# Altium PCB PCB2.PcbDoc
Units mm, origin at the board's own origin, x right, y up, seen from the top; angles counter-clockwise.
Board outline 216.35 x 75.78 mm, 2 copper layers (Top Layer, Bottom Layer), stack 1.571 mm thick; 15 components, 69 nets, 287 pads, 24 vias.
Unrouted connection lines stored in the file: 13.
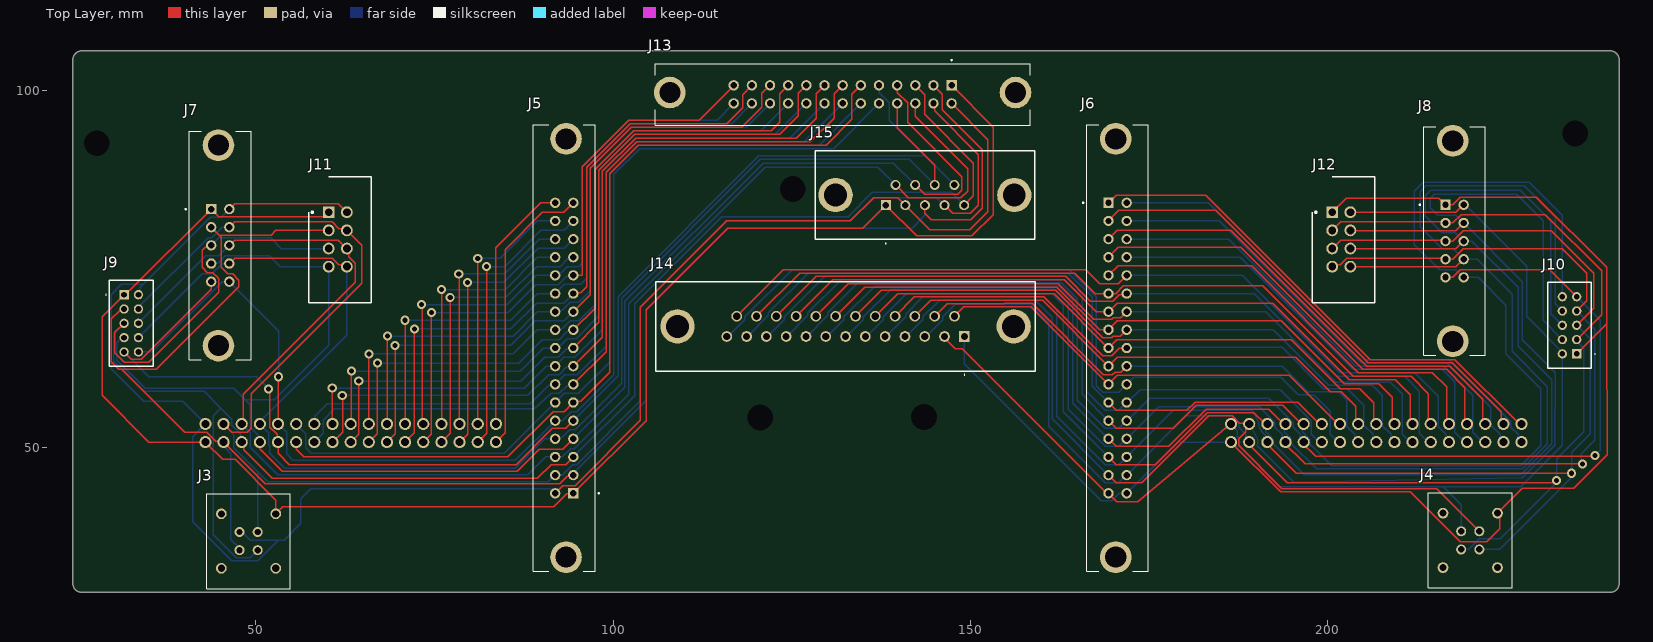
[diagram p0: Top Layer view]
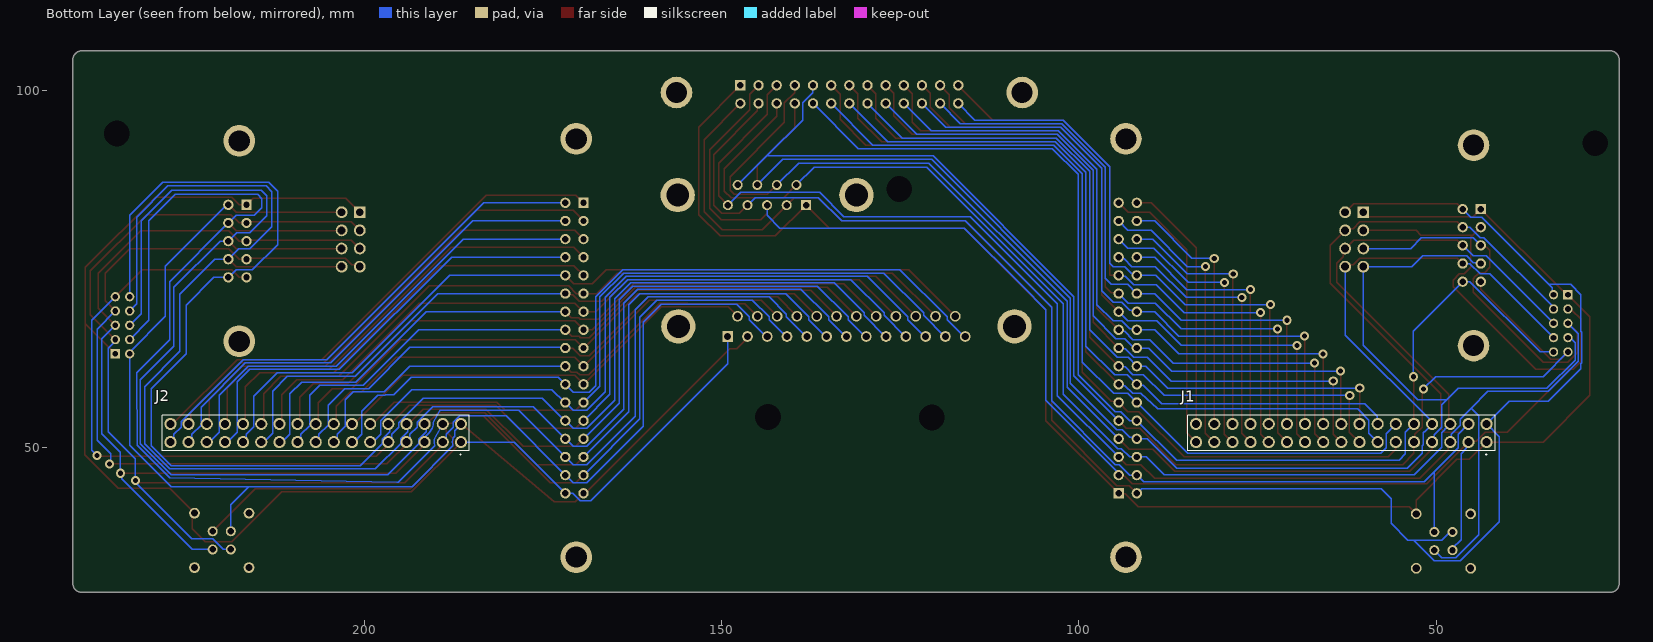
[diagram p1: Bottom Layer view, seen from below]
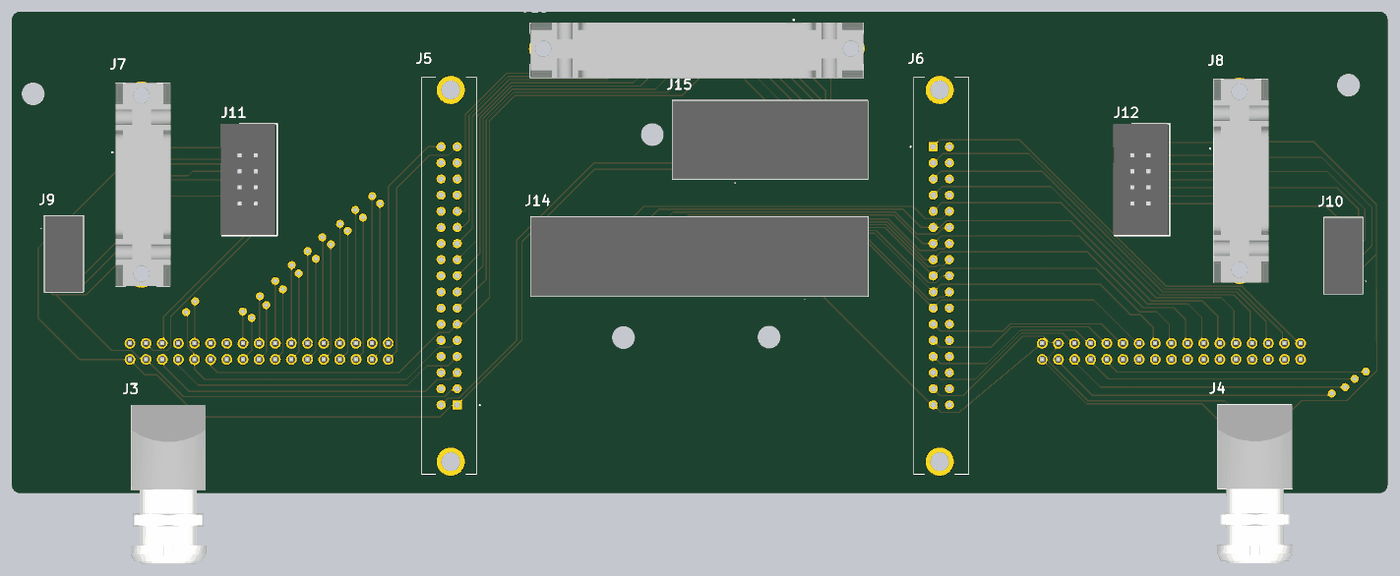
[diagram p2: 3D render of the assembled board from above, using the file's embedded part models]

## Layer stack, top to bottom
Top Solder: solder mask 0.0102, Solder Resist, Dk 3.5
Top Layer: signal copper 0.0356
Dielectric 1: dielectric 1.5, FR-4, Dk 4.8
Bottom Layer: signal copper 0.0356
Bottom Solder: solder mask 0.0102, Solder Resist, Dk 3.5

## Board outline
25.67,29.725 cw(c25.67,30.995) 24.4,30.995 24.4,104.23 cw(c25.67,104.23) 25.67,105.5 27.42,105.5 229.58,105.5 239.48,105.5 cw(c239.48,104.23) 240.75,104.23 240.75,95 240.75,43.368 240.75,30.995 cw(c239.48,30.995) 239.48,29.725 229.58,29.725 215.35,29.725 42.325,29.725 39.622,29.725 27.42,29.725

## Design rules (kind name [scope] priority, off if disabled: settings)
Clearance [All] p1: gap=0.254 ignorepadtopadclearanceinfootprint=FALSE
PolygonConnect [All] p1: connectstyle=Relief reliefconductorwidth=0.254 reliefentries=4 polygonreliefangle="90 Angle" airgapwidth=0.254
RoutingVias [All] p1: holewidth=0.711 width=1.27 viastyle="Through Hole" minholewidth=0.711 minwidth=1.27 maxholewidth=0.711 maxwidth=1.27
SolderMaskExpansion [All] p1: expansion=0.102 istentingtop=FALSE
SupplyNets "Schematic Supply Nets" [InNet('GND')] p1: voltage=0.000
Width [All] p1: maxlimit=10 minlimit=0.1 preferedwidth=0.2
30 further rules are at their usual default settings.

## Components (designator, comment, footprint, x,y, rotation, side; value= is the part's Value field where it differs from the comment)
J1 "ESQ-117-33-T-D" ESQ-117-Y-X-D 42.95,50.757 r180 bottom locked
J2 "ESQ-117-33-T-D" ESQ-117-Y-X-D 186.45,50.757 r180 bottom
J3 "EXP.0S.304.HLN" EXP0S304HLN 50.26,38.18 r270 top
J4 "EXP.0S.304.HLN" EXP0S304HLN 221.18,38.28 r270 top
J5 "D3431-6002-AR" D3431-6002-AR 94.425,43.6 r90 top
J6 "D3431-6002-AR" D3431-6002-AR 169.3,84.24 r270 top
J7 "D3793-6002-AR" D3793-6002-AR 43.76,83.36 r270 top
J8 "D3793-6002-AR" D3793-6002-AR 216.45,83.96 r270 top
J9 "98414-G08-10LF" 98414G0810LF 31.575,71.375 r270 top
J10 "98414-G08-10LF" 98414G0810LF 234.8,63.1 r90 top
J11 "N2508-6002-RB" SHDR8W64P254_2X4_1748X859X1004P 60.2,82.92 r270 top
J12 "N2508-6002-RB" SHDR8W64P254_2X4_1748X859X1004P 200.6,82.92 r270 top
J13 "D3429-6302-AR" D34296302AR 147.35,100.682 r180 top locked
J14 "L17HTNBHPOL2RM84C" L17HTNBHPOL2RM84C 149.135,65.527 r180 top locked
J15 "L177DFE09ST" L177DFE09ST 138.14,83.9 r180 top

## Footprints (in the part's own frame and the unit in brackets; to place one, negate y for a bottom-side part, rotate by r counter-clockwise, add the part's x,y. Pads: shape width x height; smd on the part's side, far side on the other; paste and mask are expansions set on the pad)
98414G0810LF [mm]
  rect 1.3x1.3 hole 0.8: A1(0,0)
  round 1.3 hole 0.8: A2(2,0) A3(4,0) A4(6,0) A5(8,0) B1(0,2) B2(2,2) B3(4,2) B4(6,2) B5(8,2)
  silkscreen extent -2,-2.6 10,4.05, body extent -2,-2.05 10,4.05, height 6.3
D3431-6002-AR [mm]
  rect 1.446x1.446 hole 0.89: 1(0,0)
  round 1.446 hole 0.89: 2(0,2.54) 3(2.54,0) 4(2.54,2.54) 5(5.08,0) 6(5.08,2.54) 7(7.62,0) 8(7.62,2.54) 9(10.16,0) 10(10.16,2.54) 11(12.7,0) 12(12.7,2.54) 13(15.24,0) 14(15.24,2.54) 15(17.78,0) 16(17.78,2.54) 17(20.32,0) 18(20.32,2.54) 19(22.86,0) 20(22.86,2.54) 21(25.4,0) 22(25.4,2.54) 23(27.94,0) 24(27.94,2.54) 25(30.48,0) 26(30.48,2.54) 27(33.02,0) 28(33.02,2.54) 29(35.56,0) 30(35.56,2.54) 31(38.1,0) 32(38.1,2.54) 33(40.64,0) 34(40.64,2.54)
  round 4.425 hole 2.95: MH1(-8.941,1.016) MH2(49.581,1.016)
  silkscreen extent -10.92,-3.61 51.56,5.59
D3793-6002-AR [mm] "Connector"
  rect 1.446x1.446 hole 0.89: 1(0,0)
  round 1.446 hole 0.89: 2(0,2.54) 3(2.54,0) 4(2.54,2.54) 5(5.08,0) 6(5.08,2.54) 7(7.62,0) 8(7.62,2.54) 9(10.16,0) 10(10.16,2.54)
  round 4.425 hole 2.95: MH1(-8.941,1.016) MH2(19.101,1.016)
  silkscreen extent -10.92,-3.63 21.08,5.59, body extent -10.93,-3.06 21.08,5.58, height 17.27
D34296302AR [mm]
  rect 1.446x1.446 hole 0.89: 1(0,0)
  round 1.446 hole 0.89: 2(0,2.54) 3(2.54,0) 4(2.54,2.54) 5(5.08,0) 6(5.08,2.54) 7(7.62,0) 8(7.62,2.54) 9(10.16,0) 10(10.16,2.54) 11(12.7,0) 12(12.7,2.54) 13(15.24,0) 14(15.24,2.54) 15(17.78,0) 16(17.78,2.54) 17(20.32,0) 18(20.32,2.54) 19(22.86,0) 20(22.86,2.54) 21(25.4,0) 22(25.4,2.54) 23(27.94,0) 24(27.94,2.54) 25(30.48,0) 26(30.48,2.54)
  round 4.425 hole 2.95: MH1(-8.941,1.016) MH2(39.421,1.016)
  silkscreen extent -10.98,-3.58 41.46,5.57, body extent -10.96,-3.07 41.36,5.57, height 17.27
ESQ-117-Y-X-D [mm]
  round 1.7 hole 1.15: 1(0,0) 2(0,2.54) 3(-2.54,0) 4(-2.54,2.54) 5(-5.08,0) 6(-5.08,2.54) 7(-7.62,0) 8(-7.62,2.54) 9(-10.16,0) 10(-10.16,2.54) 11(-12.7,0) 12(-12.7,2.54) 13(-15.24,0) 14(-15.24,2.54) 15(-17.78,0) 16(-17.78,2.54) 17(-20.32,0) 18(-20.32,2.54) 19(-22.86,0) 20(-22.86,2.54) 21(-25.4,0) 22(-25.4,2.54) 23(-27.94,0) 24(-27.94,2.54) 25(-30.48,0) 26(-30.48,2.54) 27(-33.02,0) 28(-33.02,2.54) 29(-35.56,0) 30(-35.56,2.54) 31(-38.1,0) 32(-38.1,2.54) 33(-40.64,0) 34(-40.64,2.54)
  silkscreen extent -41.82,-1.8 1.18,3.74, body extent -42.14,-1.25 1.54,3.83, height 1.81
EXP0S304HLN [mm]
  round 1.4 hole 0.9: 1(0,0) 2(0,-2.54) 3(2.54,-2.54) 4(2.54,0)
  round 1.5 hole 1: G1(-2.54,2.54) G2(-2.54,-5.08) G3(5.08,-5.08) G4(5.08,2.54)
  silkscreen extent -5.38,-7.12 7.92,4.58, body extent -5.38,-7.19 19.62,4.65, height 13.78
L17HTNBHPOL2RM84C [mm]
  rect 1.5x1.5 hole 1: 1(0,0)
  round 1.5 hole 1: 2(2.77,0) 3(5.54,0) 4(8.31,0) 5(11.08,0) 6(13.85,0) 7(16.62,0) 8(19.39,0) 9(22.16,0) 10(24.93,0) 11(27.7,0) 12(30.47,0) 13(33.24,0) 14(1.385,-2.84) 15(4.155,-2.84) 16(6.925,-2.84) 17(9.695,-2.84) 18(12.465,-2.84) 19(15.235,-2.84) 20(18.005,-2.84) 21(20.775,-2.84) 22(23.545,-2.84) 23(26.315,-2.84) 24(29.085,-2.84) 25(31.855,-2.84)
  round 4.8 hole 3.2: MH1(-6.9,-1.42) MH2(40.14,-1.42)
  silkscreen extent -9.9,-7.7 43.14,5.4, body extent -9.9,-7.7 43.14,4.85, height 12.6
L177DFE09ST [mm]
  rect 1.4x1.4 hole 0.9: 1(0,0)
  round 1.4 hole 0.9: 2(-2.74,0) 3(-5.48,0) 4(-8.22,0) 5(-10.96,0) 6(-1.37,-2.84) 7(-4.11,-2.84) 8(-6.85,-2.84) 9(-9.59,-2.84)
  round 4.8 hole 3.2: MH1(7.02,-1.42) MH2(-17.98,-1.42)
  silkscreen extent -20.83,-7.62 9.87,5.4, body extent -20.83,-7.62 9.87,4.78, height 12.3
SHDR8W64P254_2X4_1748X859X1004P [mm]
  rect 1.65x1.65 hole 1.1: 1(0,0)
  round 1.65 hole 1.1: 2(0,2.54) 3(2.54,0) 4(2.54,2.54) 5(5.08,0) 6(5.08,2.54) 7(7.62,0) 8(7.62,2.54)
  silkscreen extent -4.93,-2.8 12.68,5.92, body extent -4.93,-3.03 12.55,5.57, height 10.04

## Part data
J1 J2: "Connector", Manufacturer_Name=SAMTEC, Manufacturer_Part_Number=ESQ-117-44-T-D, Mouser Part Number=200-ESQ11744TD, Datasheet Link=http://suddendocs.samtec.com/prints/esq-1xx-xx-x-x-xxx-xx-x-xx-mkt.pdf, Mouser Price/Stock=https://www.mouser.com/Search/Refine.aspx?Keyword=200-ESQ11744TD
J3 J4: "Connector", Manufacturer_Name=LEMO, Mouser Part Number=736-EXP0S304HLN, Datasheet Link=https://www.lemo.com/catalog/ROW/UK_English/unipole_multipole.pdf, Height=12mm, Manufacturer_Part_Number=EXP.0S.304.HLN, Mouser Price/Stock=https://www.mouser.co.uk/ProductDetail/LEMO/EXP0S304HLN?qs=g4eXmMl0IezC49McAy%252Bbog%3D%3D
J5 J6 J7 J8: "Connector"
J9 J10: "Connector", Manufacturer_Name=Amphenol, Mouser Part Number=649-98414-G08-10LF, Datasheet Link=https://cdn.amphenol-cs.com/media/wysiwyg/files/drawing/98414.pdf, Height=6.2mm, Manufacturer_Part_Number=98414-G08-10LF, Mouser Price/Stock=https://www.mouser.co.uk/ProductDetail/Amphenol-FCI/98414-G08-10LF?qs=dwWE9K4rTrPm8sS0qAKvPg%3D%3D
J11 J12: "Connector", Manufacturer_Name=3M, Mouser Part Number=517-N2508-6002-RB, Datasheet Link=https://multimedia.3m.com/mws/media/330367O/3m-four-wall-header-2500-series-ts-0770.pdf, Height=10.04mm, Manufacturer_Part_Number=N2508-6002-RB, Mouser Price/Stock=https://www.mouser.com/Search/Refine.aspx?Keyword=517-N2508-6002-RB
J13: "Connector", Manufacturer_Name=3M, Mouser Part Number=517-D3429-6302-AR, Datasheet Link=http://multimedia.3m.com/mws/media/485761O/3mtm-four-wall-header-ts2245.pdf, Height=13.7mm, Manufacturer_Part_Number=D3429-6302-AR, Mouser Price/Stock=https://www.mouser.co.uk/ProductDetail/3M-Electronic-Solutions-Division/D3429-6302-AR?qs=IDj0%2FmHVFfaTU4HTZsyChw%3D%3D
J14: "Connector", Manufacturer_Name="Amphenol Communications Solutions", Mouser Part Number=523-17HTNBHPOL2RM84C, Datasheet Link=https://cdn.amphenol-cs.com/media/wysiwyg/files/drawing/l17htnxhpol2rm8xc.pdf, Height=12.5mm, Manufacturer_Part_Number=L17HTNBHPOL2RM84C, Mouser Price/Stock=https://www.mouser.co.uk/ProductDetail/Amphenol-Commercial-Products/L17HTNBHPOL2RM84C?qs=ToP8pWlZ0bO6Ujv8%2FJibmw%3D%3D
J15: "Connector", Manufacturer_Name=Amphenol, Datasheet Link=https://cdn.amphenol-cs.com/media/wysiwyg/files/drawing/l177dfxxxst.pdf, Height=12.2mm, Manufacturer_Part_Number=L177DFE09ST

## Free pads (board coordinates)
  round 0 hole 3.6 unplated: HOLE1(120.575,54.2) HOLE1(125.12,86.157) HOLE2(143.475,54.275) HOLE9(234.62,93.937) HOLE10(27.73,92.566)

## Via types
v1: diameter 1.27, hole 0.711, Top Layer to Bottom Layer, 24 vias

## Nets (pads, with @x,y where several pads share a name; then routed paths per layer and width w, separated by ;. In a path a pad name is that pad's centre, name@x,y a point inside that pad or via, vN(x,y) a via of type N, cw(c..) or ccw(c..) an arc to the next point about the centre after c; other vN are vias at no path point)
GND: J5.MH1 J5.MH2 J6.MH1 J6.MH2 J7.MH1 J7.MH2 J8.MH1 J8.MH2 J13.MH1 J13.MH2 J14.MH1 J14.MH2 J15.MH1 J15.MH2
PA1: J1.1 J3.G1 J5.1 J7.1 J9.A1 J11.1 J13.1 J15.1 | length 232.8
  Top Layer w0.2: J11.1 59.563,82.283 44.837,82.283 J7.1 32.325,71.925 32.125,71.925 J9.A1 28.525,68.325 28.525,57.288 35.057,50.757 J1.1 45.377,48.33 47.109,48.33 52.8,42.638 J3.G1 53.78,41.7 91.694,41.7 93.519,43.525 94.35,43.525 J5.1 104.6,53.775 104.6,69.3 116,80.7 134.94,80.7 J15.1 142.44,79.6 150.2,79.6 153.2,82.6 153.2,94.832 J13.1
PA2: J1.2 J3.2 J5.2 J7.2 J9.B1 J11.2 J13.2 J15.2 | length 254
  Top Layer w0.2: J7.2 47.039,84.099 61.561,84.099 J11.2 ; J5.2 92.962,44.677 94.677,44.677 103.8,53.8 103.8,69.6 115.9,81.7 133.2,81.7 136.454,84.954 139.826,84.954 J15.2 144.28,80.5 149.9,80.5 152.4,83 152.4,93.092 J13.2
  Bottom Layer w0.2: J9.B1 33.742,71.542 33.742,72.325 34.225,72.808 ; J7.2 45.134,82.194 43.611,82.194 34.225,72.808 ; J3.2 48.045,38.18 48.372,37.853 48.407,37.853 49.211,37.05 53.1,37.05 ; J5.2 91.804,43.6 91.204,44.2 57.676,44.2 56.29,42.814 56.29,39.39 53.95,37.05 53.1,37.05 ; 34.225,72.808 31.207,72.808 29.8,71.401 29.8,66.242 29.663,66.105 29.663,61.853 29.8,61.716 29.8,61 34.3,56.5 39.747,56.5 J1.2 41.182,51.529 41.182,39.616 46.666,34.132 50.243,34.132 53.1,36.989 53.1,37.05
PA3: J1.3 J3.3 J5.3 J7.3 J9.A2 J11.3 J13.3 J15.3 | length 247
  Top Layer w0.2: J9.A2 31.365,69.165 30.94,69.165 29.8,68.025 29.8,62.015 30.843,60.972 31.277,60.972 ; J7.3 44.88,79.7 ; J11.3 52.809,80.38 52.129,79.7 44.88,79.7 ; J5.3 94.246,45.961 93.557,45.961 92.496,44.9 51.347,44.9 J1.3 45.358,50.888 44.415,50.888 43.136,52.168 40.081,52.168 31.277,60.972 ; J15.3 143.62,82.77 144.49,81.9 150,81.9 151.608,83.508 151.608,91.692 146.041,97.259 146.041,99.451 J13.3 ; 31.277,60.972 36.095,60.972 47.6,72.477 47.6,73.423 46.746,74.277 46.086,74.277 45.134,75.229 45.134,79.446 44.88,79.7
  Bottom Layer w0.2: J1.3 45.777,50.47 45.777,49.866 46.5,49.143 46.5,37.1 47.72,35.88 J3.3 ; J5.3 94.425,46.433 104.6,56.608 104.6,64.624 104.6,69.3 107.907,72.607 116,80.7 141.845,80.7 143.62,82.475 J15.3
PA4: J1.4 J3.1 J5.4 J7.4 J9.B2 J11.4 J13.4 J15.4 | length 235.2
  Top Layer w0.2: J1.4 46.619,52.168 48.805,52.168 49.346,52.708 49.346,57.546 64.8,73 64.8,78.32 J11.4 62.488,80.632 61.615,80.632 60.688,81.559 47.039,81.559 J7.4 ; J13.4 144.975,97.977 144.975,97.119 151.1,90.994 151.1,83.9 149.97,82.77 147.49,82.77 J15.4
  Bottom Layer w0.2: J9.B2 33.575,69.618 43.314,79.357 43.82,79.357 45.277,80.814 46.294,80.814 J7.4 ; J1.4 46.901,51.886 46.901,49.962 50.26,46.603 ; J3.1 50.26,46.603 ; J15.4 145.306,84.954 136.454,84.954 133.2,81.7 115.9,81.7 103.8,69.6 103.8,56.532 94.871,47.603 94.365,47.603 92.908,46.146 91.891,46.146 J5.4 90.945,45.2 51.663,45.2 50.26,46.603
PA5: J1.5 J3.4 J5.5 J7.5 J9.A3 J11.5 J13.5 J15.5 | length 255
  Top Layer w0.2: J9.A3 30.3,66.1 30.3,63.23 31.613,61.917 35.054,61.917 44.837,71.7 44.837,73.551 44.837,73.634 ; J7.5 43.525,78.045 42.948,78.045 42.477,77.574 42.477,75.22 43.227,74.47 44.001,74.47 44.419,74.052 cw(c43.76,73.2) 44.538,73.944 44.836,73.635 ; J1.5 48.288,50.498 48.288,49.708 52.297,45.7 89.4,45.7 91.303,47.603 93.348,47.603 J5.5@94.419,48.674 ; J13.5 143.604,99.348 143.604,96.596 150.4,89.8 150.4,85.2 J15.5
  Bottom Layer w0.2: J9.A3 30.117,65.917 30.117,62.041 34.312,57.846 42.754,57.846 45.112,55.488 ; J7.5 44.837,79.357 52.072,79.357 53.589,77.84 J11.5 ; J1.5 47.898,50.888 47.898,51.832 46.619,53.111 46.619,53.981 45.112,55.488 ; J3.4 49.206,34.586 48.157,34.586 47.283,34.586 44.138,37.732 44.079,37.79 44.079,40.639 cw(c45.18,40.72) 44.079,40.801 44.079,54.455 45.112,55.488 ; J5.5 103,57.255 103,70.1 115.2,82.3 132.88,82.3 136.28,85.7 139.339,85.7 ccw(c139.51,86.74) 139.51,85.686 144.99,85.686 ccw(c144.99,86.74) 145.161,85.7 147.3,85.7 147.359,85.641 J15.5
PA6: J1.6 J5.6 J7.6 J9.B3 J11.6 J13.6 J15.6 | length 214.5
  Top Layer w0.2: J7.6 47.039,79.019 61.561,79.019 J11.6 62.992,77.588 62.992,76.715 63.919,75.788 63.919,73.119 48.256,57.456 48.256,53.522 J1.6 ; J15.6 141.296,84.954 144.057,84.954 144.065,84.946 145.915,84.946 145.923,84.954 146.797,84.954 146.805,84.946 148.655,84.946 149.595,85.886 149.595,89.015 142.27,96.34 J13.6
  Bottom Layer w0.2: J9.B3 43.017,76.817 44.837,76.817 J7.6 ; J1.6 48.78,52.547 48.78,52.52 49.234,52.066 49.234,50.038 53.072,46.2 88.069,46.2 90.549,48.68 J5.6 91.891,48.686 92.908,48.686 94.068,49.846 94.574,49.846 102.2,57.472 102.2,70.1 121.3,89.2 137.05,89.2 J15.6
PA7: J1.7 J5.7 J7.7 J9.A4 J11.7 J13.7 J15.7 | length 220
  Top Layer w0.2: J1.7 50.57,49.798 53.668,46.7 86.6,46.7 89.657,49.757 92.962,49.757 J5.7@94.426,51.221 ; J13.7 139.736,100.676 139.736,99.659 141.193,98.202 141.193,95.507 148.784,87.916 148.784,85.979 148.205,85.4 146.993,85.4 146.985,85.408 145.735,85.408 145.727,85.4 144.253,85.4 144.245,85.408 143.582,85.408 J15.7
  Bottom Layer w0.2: J9.A4 31.277,65.375 30.571,64.669 30.571,62.229 34.5,58.3 46.9,58.3 48.5,56.7 ; J7.7 43.902,75.882 44.783,75.882 45.718,76.817 51.885,76.817 53.402,75.3 J11.7 60.2,64.3 52.6,56.7 48.5,56.7 ; J1.7 50.283,51.044 50.283,51.771 49.234,52.82 49.234,55.966 48.5,56.7 ; J5.7 101.654,58.449 101.654,70.454 121,89.8 139.19,89.8 J15.7
PA8: J1.8 J5.8 J7.8 J9.B4 J11.8 J13.8 J15.8 | length 199.8
  Top Layer w0.2: J7.8 47.039,76.479 60.688,76.479 61.615,75.552 62.488,75.552 J11.8 ; J13.8 139.73,94.74 144.99,89.48 J15.8
  Bottom Layer w0.2: J9.B4 42.477,74.277 43.82,74.277 45.277,75.734 46.294,75.734 J7.8 ; J11.8 62.74,65.74 50.57,53.57 J1.8 51.628,52.239 51.672,52.195 51.805,52.062 51.805,50.359 51.937,50.227 51.937,49.215 54.052,47.1 86.3,47.1 90.42,51.22 J5.8 92.123,51.458 92.892,51.458 93.914,52.48 94.68,52.48 101.2,59 101.2,70.9 120.6,90.3 141.43,90.3 J15.8
PA9: J1.9 J5.9 J7.9 J9.A5 J13.9 J15.9 | length 183.5
  Top Layer w0.2: J9.A5 32.579,62.371 33.991,62.371 43.76,72.14 J7.9 ; v1(51.8,58.2) 51.979,58.021 51.979,52.831 52.978,51.832 52.978,50.888 J1.9 53.11,49.19 54.7,47.6 86.423,47.6 91.5,52.677 93.342,52.677 J5.9
  Bottom Layer w0.2: J9.A5 35.018,59.932 50.068,59.932 v1(51.8,58.2) ; J5.9 100.7,60.035 100.7,71.1 120.4,90.8 143.67,90.8 ; J13.9 137.196,100.676 137.196,99.659 138.653,98.202 138.653,95.817 143.67,90.8 ; J15.9 143.67,90.8
PA10: J1.10 J5.10 J7.10 J9.B5 J13.10 | length 164.7
  Top Layer w0.2: J1.10 53.155,53.342 53.155,59.855 v1(53.2,59.9)
  Bottom Layer w0.2: J9.B5 35.458,63.375 45.277,73.194 46.294,73.194 J7.10 53.2,66.3 v1(53.2,59.9) ; J1.10 53.11,53.19 53.217,53.19 54.3,52.107 54.3,49.1 55.2,48.2 86.325,48.2 J5.10 91.891,53.766 92.908,53.766 94.142,55 94.9,55 100.1,60.2 100.1,88.2 103.7,91.8 130.848,91.8 J13.10
PA11: J1.11 J5.11 J13.11 | length 120.3
  Top Layer w0.2: J1.11 55.65,49.767 56.737,48.68 85.28,48.68 91.6,55 93.125,55 J5.11 94.584,56.459 95.448,56.459 99.5,60.511 99.5,88.3 103.5,92.3 129.8,92.3 133.4,95.9 133.4,99.432 J13.11
PA12: J1.12 J5.12 J13.12 | length 117.6
  Bottom Layer w0.2: J1.12 57,51.947 57,49.967 57.767,49.2 84.785,49.2 J5.12 93.185,57.6 95.148,57.6 99.5,61.952 99.5,88.3 103.5,92.3 128.808,92.3 J13.12
PA13: J1.13 J5.13 J13.13 | length 112.3
  Top Layer w0.2: J5.13 99,63.415 99,88.5 103.3,92.8 127.6,92.8 130.9,96.1 130.9,99.472 J13.13
  Bottom Layer w0.2: J1.13 59.422,51.989 59.422,53.827 60.995,55.4 88.951,55.4 91.311,57.6 92.479,57.6 93.549,58.67 94.255,58.67 J5.13
PA14: J1.14 J5.14 J13.14 | length 107.3
  Bottom Layer w0.2: J1.14 58.272,53.378 58.272,54.372 60.011,56.111 88.411,56.111 90.989,58.689 91.734,58.689 J5.14 93.208,60.163 94.963,60.163 99,64.2 99,88.5 103.3,92.8 126.768,92.8 J13.14
PA15: J1.15 J5.15 J13.15 | length 108.2
  Top Layer w0.2: J1.15 62.141,52.168 62.141,57.259 v1(62.1,57.3) ; J5.15 98.489,65.444 98.489,88.631 103.158,93.3 125.6,93.3 128.4,96.1 128.4,99.512 J13.15
  Bottom Layer w0.2: v1(62.1,57.3) 88.06,57.3 90.96,60.2 92.436,60.2 93.519,61.283 94.328,61.283 J5.15
PA16: J1.16 J5.16 J13.16 | length 103.4
  Top Layer w0.2: v1(60.7,58.3) 60.715,58.285 60.715,53.312 J1.16
  Bottom Layer w0.2: v1(60.7,58.3) 87.574,58.3 90.654,61.38 J5.16 93.105,62.6 94.629,62.6 98.489,66.46 98.489,88.631 103.158,93.3 124.728,93.3 J13.16
PA17: J1.17 J5.17 J13.17 | length 103.1
  Top Layer w0.2: J1.17 64.4,51.887 v1(64.4,59.3) ; J5.17 98,67.495 98,88.784 103.016,93.8 123.3,93.8 125.9,96.4 125.9,99.552 J13.17
  Bottom Layer w0.2: v1(64.4,59.3) 87.1,59.3 90.4,62.6 92.316,62.6 93.519,63.803 94.308,63.803 J5.17
PA18: J1.18 J5.18 J13.18 | length 98.5
  Top Layer w0.2: J1.18 63.335,53.362 63.335,60.635 v1(63.4,60.7)
  Bottom Layer w0.2: v1(63.4,60.7) 87,60.7 90.22,63.92 92.22,63.92 93.55,65.25 94.819,65.25 98,68.431 98,88.784 103.016,93.8 122.688,93.8 J13.18
PA19: J1.19 J5.19 J13.19 | length 98.8
  Top Layer w0.2: J1.19 67,51.947 v1(67,61.8) ; J5.19 97.473,69.508 97.473,88.899 102.874,94.3 122.127,94.3 123.3,95.473 123.3,99.492 J13.19
  Bottom Layer w0.2: v1(67,61.8) 86.8,61.8 90.1,65.1 92.448,65.1 93.593,66.245 94.21,66.245 J5.19
PA20: J1.20 J5.20 J13.20 | length 94.1
  Top Layer w0.2: J1.20 v1(65.81,63.11)
  Bottom Layer w0.2: v1(65.81,63.11) 86.05,63.11 89.4,66.46 J5.20 92.025,66.6 92.908,66.6 94.008,67.7 95.197,67.7 97.473,69.976 97.473,88.899 102.874,94.3 120.648,94.3 J13.20
PA21: J1.21 J5.21 J13.21 | length 93
  Top Layer w0.2: J1.21 69.5,51.907 v1(69.5,64.3) ; J5.21 96.8,71.375 96.8,89.057 102.543,94.8 117.981,94.8 120.8,97.619 120.8,99.532 J13.21
  Bottom Layer w0.2: v1(69.5,64.3) 85.7,64.3 89.1,67.7 93.125,67.7 J5.21
PA22: J1.22 J5.22 J13.22 | length 89.4
  Top Layer w0.2: J1.22 68.375,53.322 68.375,65.575 v1(68.4,65.6)
  Bottom Layer w0.2: v1(68.4,65.6) 86,65.6 89.4,69 J5.22 92.079,69.194 92.908,69.194 94.011,70.297 95.197,70.297 96.8,71.9 96.8,89.057 102.543,94.8 118.608,94.8 J13.22
PA23: J1.23 J5.23 J13.23 | length 88.6
  Top Layer w0.2: J1.23 72.2,52.067 v1(72.2,66.6) ; J5.23 94.553,71.668 95.448,71.668 96.3,72.52 96.3,89.222 102.378,95.3 115.881,95.3 118.1,97.519 118.1,99.372 J13.23
  Bottom Layer w0.2: v1(72.2,66.6) 85.7,66.6 89.3,70.2 93.085,70.2 J5.23
PA24: J1.24 J5.24 J13.24 | length 84.7
  Top Layer w0.2: J1.24 70.895,53.302 70.895,67.795 v1(70.9,67.8)
  Bottom Layer w0.2: v1(70.9,67.8) 85.66,67.8 89.4,71.54 J5.24 93.184,72.839 95.439,72.839 96.3,73.7 96.3,89.222 102.378,95.3 116.568,95.3 J13.24
PA25: J1.25 J5.25 J13.25 | length 83
  Top Layer w0.2: J1.25 74.559,51.886 v1(74.559,68.874) ; J5.25 95.583,74.08 95.7,74.197 95.7,89.3 102.2,95.8 112.075,95.8 116.87,100.595 J13.25
  Bottom Layer w0.2: v1(74.559,68.874) 85.274,68.874 89.2,72.8 92.335,72.8 93.519,73.984 94.329,73.984 J5.25
PA26: J1.26 J5.26 J13.26 | length 80
  Top Layer w0.2: v1(73.2,70) 73.315,69.885 73.315,53.412 J1.26
  Bottom Layer w0.2: v1(73.2,70) 85.137,70 89.217,74.08 J5.26 92.123,74.318 92.6,74.318 93.582,75.3 95.2,75.3 95.7,75.8 95.7,89.3 102.2,95.8 114.528,95.8 J13.26
PA27: J1.27 J5.27 | length 40.3
  Top Layer w0.2: J1.27 77.2,51.987 v1(77.2,71)
  Bottom Layer w0.2: v1(77.2,71) 85,71 89.3,75.3 92.587,75.3 93.669,76.382 94.187,76.382 J5.27
PA28: J1.28 J5.28 | length 36.6
  Top Layer w0.2: J1.28 75.985,53.312 75.985,72.085 v1(76,72.1)
  Bottom Layer w0.2: v1(76,72.1) 84.88,72.1 89.4,76.62 J5.28
PA29: J1.29 J5.29 | length 40.2
  Top Layer w0.2: J1.29 79.639,51.886 79.639,62.949 79.639,73.061 v1(79.6,73.1)
  Bottom Layer w0.2: v1(79.6,73.1) 84.7,73.1 89.5,77.9 93.165,77.9 J5.29
PA30: J1.30 J5.30 | length 36.5
  Top Layer w0.2: v1(78.4,74.3) 78.455,74.245 78.455,53.352 J1.30
  Bottom Layer w0.2: v1(78.4,74.3) 84.817,74.3 89.677,79.16 J5.30
PA31: J1.31 J5.31 | length 39.8
  Top Layer w0.2: J1.31 82.3,52.007 v1(82.3,75.3)
  Bottom Layer w0.2: v1(82.3,75.3) 84.8,75.3 89.9,80.4 93.125,80.4 J5.31
PA32: J1.32 J5.32 | length 36.2
  Top Layer w0.2: J1.32 v1(81.05,76.47)
  Bottom Layer w0.2: v1(81.05,76.47) 84.17,76.47 89.4,81.7 J5.32
PA33: J1.33 J5.33 | length 39.7
  Top Layer w0.2: J1.33 84.9,52.067 84.9,77.7 90.1,82.9 93.085,82.9 J5.33
PA34: J1.34 J5.34 | length 35.5
  Top Layer w0.2: J1.34 83.59,77.93 89.9,84.24 J5.34
PB1: J2.1 J4.G1 J6.34 J8.1 J10.A1 J12.1 J14.1 | length 193.9
  Top Layer w0.2: J2.1@186.12,50.757 186.421,50.757 193.386,43.792 211.547,43.792 218.539,36.8 222.19,36.8 224.007,38.617 224.007,40.053 223.969,40.091 223.969,40.571 J4.G1 227.2,44.3 234.384,44.3 239.089,49.005 238.99,67.124 238.99,67.29 ; J12.1 202.58,84.9 215.51,84.9 J8.1 217.467,83.96 218.544,85.037 229.163,85.037 239,75.2 239,67.3 238.99,67.29 ; J10.A1 238.99,67.29
  Bottom Layer w0.2: J14.1 149.135,61.688 168.3,42.523 169.746,42.523 170.817,43.594 171.834,43.594 J6.34 178.997,50.757 J2.1@186.12,50.757
PB2: J2.2 J4.2 J6.33 J8.2 J10.B1 J12.2 J14.2 | length 170.4
  Top Layer w0.2: J14.2 146.547,65.345 146.547,65.148 147.864,63.831 148.84,63.831 169.071,43.6 J6.33 170.48,42.42 173.361,42.42 186.081,53.043 186.146,53.108 186.146,53.225 J2.2@186.12,53.297 ; J12.2 203.177,82.883 217.913,82.883 J8.2
  Bottom Layer w0.2: J2.2@186.12,53.297 186.359,53.297 187.23,52.426 187.288,52.367 187.288,51.702 187.288,51.621 187.301,51.608 cw(c186.45,50.757) 187.584,50.352 187.584,50.236 193.285,44.536 216.103,44.536 ; J4.2@218.643,38.283 218.643,41.996 216.103,44.536 ; J8.2 219.229,83.96 227.803,75.386 227.803,68.336 232.8,63.339 J10.B1 ; J10.B1@232.803,63.097 232.803,50.336 227.003,44.536 216.103,44.536
PB3: J2.3 J4.3 J6.32 J8.3 J10.A2 J12.3 J14.3 | length 210.5
  Top Layer w0.2: J2.3@188.66,50.757 194.317,45.1 231.41,45.1 231.71,45.4 v1(232,45.4) ; J12.3 201.779,81.559 216.311,81.559 J8.3 216.456,81.426 217.473,81.426 218.647,82.6 230.4,82.6 238.3,74.7 238.3,68.6 J10.A2
  Bottom Layer w0.2: J14.3 143.701,65.527 146.084,67.91 146.084,68.262 147.894,70.072 158.428,70.072 160.975,67.525 160.975,52.942 168.854,45.063 170.763,45.063 J6.32 180.126,54.426 186.588,54.426 187.495,53.519 187.495,52.866 188.528,51.832 188.528,50.889 J2.3@188.66,50.757 ; J4.3 219.689,35.74 221.175,37.226 224.094,37.226 232,45.132 232,48.4 235.804,52.204 235.804,63.897 234.8,64.901 J10.A2
PB4: J2.4 J4.1 J6.31 J8.4 J10.B2 J12.4 J14.4 | length 259.4
  Top Layer w0.2: J6.31 170.377,45.063 173.969,45.063 183.332,54.426 186.588,54.426 187.585,53.429 188.528,53.429 188.66,53.297 188.528,53.165 188.528,52.222 187.531,51.225 187.531,50.289 193.574,44.246 215.214,44.246 J4.1 ; J12.4 203.177,80.343 217.913,80.343 J8.4
  Bottom Layer w0.2: J14.4 140.931,65.527 143.314,67.91 143.314,68.262 145.661,70.609 159.04,70.609 161.429,68.22 161.429,54.011 J6.31 ; J2.4 188.99,53.227 190.023,51.446 cw(c188.897,50.79) 190.124,50.352 190.124,50.319 190.124,50.236 195.181,45.18 195.239,45.121 195.405,45.121 227.188,45.746 231.754,50.312 231.8,60.334 231.8,60.5 231.741,60.559 227.2,65.1 227.2,73.21 J8.4 217.913,82.497 215.36,82.497 214.3,83.557 214.3,84.8 214.9,85.4 226.4,85.4 230.1,81.7 230.1,67.8 J10.B2
PB5: J2.5 J4.4 J6.30 J8.5 J10.A3 J12.5 J14.5 | length 214
  Top Layer w0.2: J2.5@191.2,50.757 195.557,46.4 v1(234.1,46.4) ; J12.5 201.779,79.019 216.311,79.019 J8.5 216.456,78.886 217.473,78.886 218.93,80.343 231.257,80.343 237.2,74.4 237.2,69.5 J10.A3
  Bottom Layer w0.2: J14.5 138.161,65.527 140.939,68.304 140.939,68.657 143.345,71.063 160.259,71.063 162.079,69.243 162.079,54.378 168.854,47.603 170.763,47.603 J6.30 178.387,55.227 189.363,55.227 189.442,55.148 190.334,53.5 190.334,53.449 190.334,53.438 ccw(c191.53,53.297) 190.493,52.685 190.878,52.034 191.423,51.489 191.617,51.13 191.617,51.05 J2.5 ; J4.4 224.007,35.74 233.922,45.656 233.922,46.222 v1(234.1,46.4) 234.1,49.354 236.7,51.954 236.7,65.2 J10.A3
PB6: J2.6 J6.29 J8.6 J10.B3 J12.6 J14.6 | length 221.7
  Top Layer w0.2: J6.29 170.377,47.603 175.867,47.603 183.144,54.88 189.617,54.88 J2.6@191.2,53.297 ; J12.6 203.177,77.803 217.913,77.803 J8.6
  Bottom Layer w0.2: J14.6 135.391,65.527 137.774,67.91 137.774,68.262 141.029,71.517 161.429,71.517 163,69.946 163,54.98 J6.29 ; J2.6@191.2,53.297 191.332,53.165 191.332,52.222 192.365,51.188 192.365,50.535 196.7,46.2 227,46.2 231.3,50.5 231.3,59.484 226.6,64.184 226.6,72.4 220.12,78.88 J8.6 217.824,80.046 216.011,80.046 213.6,82.457 213.6,85.2 214.4,86 226.9,86 231.205,81.695 231.205,68.695 J10.B3
PB7: J2.7 J6.28 J8.7 J10.A4 J12.7 J14.7 | length 197.8
  Top Layer w0.2: J2.7@193.74,50.757 196.797,47.7 v1(235.6,47.7) ; J12.7 200.852,75.552 201.725,75.552 202.652,76.479 216.311,76.479 J8.7 216.456,76.346 217.473,76.346 218.93,77.803 232.801,77.803 236.2,74.404 236.2,70.5 J10.A4
  Bottom Layer w0.2: J14.7 132.621,65.527 135.004,67.91 135.004,68.262 138.88,72.138 161.724,72.138 163.65,70.212 163.65,55.347 168.854,50.143 170.763,50.143 J6.28 176.32,55.7 190.394,55.7 192.575,53.519 192.575,52.866 193.608,51.832 193.608,50.889 J2.7@193.74,50.757 ; J10.A4 237.346,66.554 237.346,51.046 235.418,49.118 235.418,47.882 v1(235.6,47.7)
PB8: J2.8 J6.27 J8.8 J10.B4 J12.8 J14.8 | length 225.4
  Top Layer w0.2: J6.27 170.377,50.143 177.765,50.143 182.956,55.334 191.703,55.334 J2.8@193.74,53.297 ; J12.8 203.177,75.263 217.913,75.263 J8.8
  Bottom Layer w0.2: J14.8 129.851,65.527 132.234,67.91 132.234,68.262 136.564,72.592 162.378,72.592 164.299,70.67 164.299,56.221 J6.27 ; J2.8@193.74,53.297 193.872,53.165 193.872,52.222 194.899,51.194 194.899,50.541 198.44,47 227.158,47 230.704,50.546 230.704,58.535 225.764,63.475 225.764,71.464 220.888,76.34 J8.8 217.527,77.803 216.004,77.803 212.919,80.887 212.919,85.817 213.702,86.6 227.443,86.6 231.796,82.247 231.796,70.104 J10.B4
PB9: J2.9 J6.26 J8.9 J10.A5 J14.9 | length 180.8
  Top Layer w0.2: J2.9@196.28,50.757 198.278,48.759 237.251,48.759 v1(237.346,48.854) ; J8.9 216.456,73.806 217.473,73.806 218.544,74.877 231.023,74.877 J10.A5
  Bottom Layer w0.2: J14.9 127.081,65.527 130.026,68.472 130.026,68.824 134.248,73.046 162.683,73.046 164.9,70.829 164.9,56.637 168.854,52.683 170.763,52.683 J6.26 171.955,53.76 175.095,56.9 191.734,56.9 195.151,53.483 195.151,52.829 196.148,51.832 196.148,50.889 J2.9@196.28,50.757 ; J10.A5 238.1,67.8 238.1,49.608 v1(237.346,48.854)
PB10: J2.10 J6.25 J8.10 J10.B5 J14.10 | length 212.5
  Top Layer w0.2: J6.25 170.377,52.683 178.383,52.683 181.6,55.9 193.677,55.9 J2.10@196.28,53.297
  Bottom Layer w0.2: J14.10 124.311,65.527 127.256,68.472 127.256,68.824 131.932,73.5 163.1,73.5 165.61,70.99 165.61,57.45 J6.25 ; J2.10@196.28,53.297 196.412,53.165 196.412,52.222 197.445,51.188 197.445,50.535 200.526,47.454 226.954,47.454 229.75,50.25 229.75,58.25 224.9,63.1 224.9,69.9 221,73.8 J8.10 217.913,74.877 215.623,74.877 212.1,78.4 212.1,85.831 213.369,87.1 228.2,87.1 232.8,82.5 J10.B5
PB11: J2.11 J6.24 J14.11 | length 101.9
  Bottom Layer w0.2: J14.11 121.541,65.527 123.924,67.91 123.924,68.262 129.616,73.954 163.288,73.954 166.252,70.99 166.252,57.825 168.854,55.223 170.763,55.223 J6.24 171.921,56.3 173.721,58.1 193.334,58.1 197.691,53.743 197.691,51.886 J2.11@198.82,50.757
PB12: J2.12 J6.23 J14.12 | length 101
  Top Layer w0.2: J6.23 170.377,55.223 180.281,55.223 181.412,56.354 195.763,56.354 J2.12@198.82,53.297
  Bottom Layer w0.2: J14.12 118.771,65.527 121.716,68.472 121.716,68.824 127.3,74.408 163.65,74.408 167,71.058 167,58.6 J6.23
PB13: J2.13 J6.22 J14.13 | length 110.5
  Bottom Layer w0.2: J14.13 116.001,65.527 118.384,67.91 118.384,68.262 125.022,74.9 163.8,74.9 167.6,71.1 167.6,58.642 168.479,57.763 170.763,57.763 J6.22 172.8,59.8 193.4,59.8 195.846,57.354 197.004,57.354 197.02,57.338 198.062,57.338 200.249,55.151 200.308,55.092 200.308,53.627 cw(c199.15,53.297) 200.308,52.967 200.308,51.809 200.367,51.75 J2.13@201.36,50.757
PB14: J2.14 J6.21 J14.14 | length 62
  Top Layer w0.2: J14.14 149.075,69.692 154.885,69.692 154.894,69.701 158.439,69.701 J6.21 170.56,60.1 194.557,60.1 J2.14@201.36,53.297
PB15: J2.15 J6.20 J14.15 | length 71.4
  Top Layer w0.2: J14.15 146.759,70.146 154.697,70.146 154.706,70.155 158.627,70.155 168.599,60.183 169.844,60.183 170.215,60.554 171.014,60.554 J6.20
  Bottom Layer w0.2: J6.20 171.86,61.4 193.6,61.4 197.208,57.792 201.531,57.792 202.632,56.691 202.632,52.968 203.768,51.832 203.768,50.889 J2.15@203.9,50.757
PB16: J2.16 J6.19 J14.16 | length 72.2
  Top Layer w0.2: J14.16 144.443,70.6 154.509,70.6 154.518,70.609 160.071,70.609 J6.19 170.52,62.6 195.5,62.6 200.308,57.792 201.846,57.792 203.9,55.738 J2.16@203.9,53.297
PB17: J2.17 J6.18 J14.17 | length 79.7
  Top Layer w0.2: J14.17 142.136,71.063 160.259,71.063 168.479,62.843 169.746,62.843 170.817,63.914 171.834,63.914 J6.18
  Bottom Layer w0.2: J6.18 171.92,64 193.6,64 199.354,58.246 202.7,58.246 205.029,55.917 205.029,53.111 206.308,51.832 206.308,50.889 J2.17@206.44,50.757
PB18: J2.18 J6.17 J14.18 | length 81.3
  Top Layer w0.2: J14.18 139.82,71.517 161.703,71.517 J6.17 170.48,65.1 194.9,65.1 201.754,58.246 204.448,58.246 206.44,56.254 J2.18@206.44,53.297
PB19: J2.19 J6.16 J14.19 | length 89.3
  Top Layer w0.2: J14.19 137.504,71.971 161.891,71.971 168.479,65.383 169.746,65.383 169.917,65.554 170.934,65.554 J6.16
  Bottom Layer w0.2: J6.16 192.34,66.46 200.1,58.7 206.2,58.7 207.611,57.289 207.611,53.07 208.848,51.832 208.848,50.889 J2.19@208.98,50.757
PB20: J2.20 J6.15 J14.20 | length 90.7
  Top Layer w0.2: J14.20 135.188,72.425 162.079,72.425 168.044,66.46 J6.15 170.54,67.7 193.5,67.7 202.3,58.9 207.1,58.9 208.98,57.02 J2.20@208.98,53.297
PB21: J2.21 J6.14 J14.21 | length 98.4
  Top Layer w0.2: J14.21 132.872,72.879 162.267,72.879 167.223,67.923 169.746,67.923 169.977,68.154 170.994,68.154 J6.14
  Bottom Layer w0.2: J6.14 191.3,69 201.145,59.155 208.745,59.155 210.391,57.509 210.391,51.886 J2.21@211.52,50.757
PB22: J2.22 J6.13 J14.22 | length 99.8
  Top Layer w0.2: J14.22 130.723,73.5 163.1,73.5 167.6,69 J6.13 170.5,70.2 192.3,70.2 203,59.5 209.4,59.5 211.52,57.38 J2.22@211.52,53.297
PB23: J2.23 J6.12 J14.23 | length 107.5
  Top Layer w0.2: J14.23 128.407,73.954 163.288,73.954 166.779,70.463 169.882,70.463 170.817,71.398 171.698,71.398 J6.12
  Bottom Layer w0.2: J6.12 189.66,71.54 201.227,59.973 210.727,59.973 212.8,57.9 212.8,52.017 J2.23@214.06,50.757
PB24: J2.24 J6.11 J14.24 | length 108.6
  Top Layer w0.2: J14.24 126.091,74.408 164.592,74.408 167.46,71.54 J6.11 169.306,71.546 170.323,71.546 171.394,72.617 190.883,72.617 203.527,59.973 211.627,59.973 214.06,57.54 J2.24@214.06,53.297
PB25: J2.25 J6.10 J14.25 | length 116
  Top Layer w0.2: J14.25 123.775,74.862 166.138,74.862 168.1,72.9 170.66,72.9 J6.10
  Bottom Layer w0.2: J6.10 188.02,74.08 201.623,60.477 212.123,60.477 215.421,57.179 215.421,52.88 216.468,51.832 216.468,50.889 J2.25@216.6,50.757
PB26: J2.26 J6.9 | length 60.1
  Top Layer w0.2: J6.9 170.656,75.436 189.314,75.436 204.273,60.477 214.6,60.477 216.6,58.477 J2.26@216.6,53.297
PB27: J2.27 J6.8 | length 62.1
  Bottom Layer w0.2: J6.8 187.765,76.62 203.454,60.931 216.027,60.931 217.729,59.229 217.729,52.168 J2.27@219.14,50.757
PB28: J2.28 J6.7 | length 63.6
  Top Layer w0.2: J6.7 170.68,78 187.8,78 204.869,60.931 216.593,60.931 219.14,58.384 J2.28@219.14,53.297
PB29: J2.29 J6.6 | length 64.6
  Bottom Layer w0.2: J6.6 186.14,79.16 203.915,61.385 216.215,61.385 220.269,57.331 220.269,52.168 J2.29@221.68,50.757
PB30: J2.30 J6.5 | length 66.1
  Top Layer w0.2: J6.5 170.54,80.4 186.4,80.4 205.415,61.385 217.047,61.385 221.68,56.752 J2.30@221.68,53.297
PB31: J2.31 J6.4 | length 67.2
  Bottom Layer w0.2: J6.4 184.8,81.7 204.661,61.839 216.593,61.839 222.809,55.623 222.809,53.111 224.088,51.832 224.088,50.889 J2.31@224.22,50.757
PB32: J2.32 J6.3 | length 68.9
  Top Layer w0.2: J6.3 170.763,83.163 184.337,83.163 205.661,61.839 217.361,61.839 224.22,54.98 J2.32@224.22,53.297
PB33: J2.33 J6.2 | length 69.8
  Bottom Layer w0.2: J6.2 183.26,84.24 205.207,62.293 216.907,62.293 225.595,53.605 225.595,52.866 226.628,51.832 226.628,50.889 J2.33@226.76,50.757
PB34: J2.34 J6.1 | length 71.2
  Top Layer w0.2: J6.1 170.377,85.317 182.884,85.317 205.909,62.293 217.764,62.293 J2.34@226.76,53.297
pads on no net: J3.G2 J3.G3 J3.G4 J4.G2 J4.G3 J4.G4

## Silkscreen, mask and mechanical layers (free items; w line width, h text height)
Mechanical 1:
  circle w0.254: c187.96,78.732 r5.125
  circle w0.254: c187.96,94.329 r6.1
  circle w0.254: c76.485,94.272 r6.1
  circle w0.254: c76.485,78.675 r5.125
  lines w0.254: 69.385,78.718 69.385,94.289 ; 69.385,78.718 69.385,77.85 ccw(c74.685,77.85) 74.685,72.55 78.285,72.55 ccw(c78.285,77.85) 83.585,77.85 83.585,78.705 ; 69.385,78.718 69.385,78.705 83.585,78.705 ; 69.385,94.289 69.385,96.129 cw(c74.685,96.129) 74.685,101.429 78.285,101.429 cw(c78.285,96.129) 83.585,96.129 83.585,94.267 ; 69.385,94.289 83.585,94.267 ; 83.585,78.705 83.585,84.129 83.585,94.267 ; 180.86,78.775 180.86,77.907 ccw(c186.16,77.907) 186.16,72.607 189.76,72.607 ccw(c189.76,77.907) 195.06,77.907 195.06,78.762 ; 180.86,78.775 180.86,94.346 ; 180.86,78.775 180.86,78.762 195.06,78.762 ; 180.86,94.346 195.06,94.324 ; 180.86,94.346 180.86,96.186 cw(c186.16,96.186) 186.16,101.486 189.76,101.486 cw(c189.76,96.186) 195.06,96.186 195.06,94.324 ; 195.06,78.762 195.06,84.186 195.06,94.324 ; 24.4,30.995 ccw(c25.67,30.995) 25.67,29.725 27.42,29.725 39.622,29.725 42.325,29.725 215.35,29.725 224.275,29.725 229.58,29.725 239.48,29.725 ccw(c239.48,30.995) 240.75,30.995 240.75,43.368 240.75,95 240.75,104.23 ccw(c239.48,104.23) 239.48,105.5 229.58,105.5 93.154,105.5 86.7,105.5 39.67,105.5 27.42,105.5 25.67,105.5 ccw(c25.67,104.23) 24.4,104.23 24.4,96.331 24.4,40.724 24.4,30.995